# Altium PCB VECTOR_routed.PcbDoc (part 2 of 3)
Units mil, origin at the board's own origin, x right, y up, seen from the top; angles counter-clockwise.
Board outline 6000 x 4000 mil, 8 copper layers (Top Layer, Signal Layer 1, Signal Layer 2, Signal Layer 3, Signal Layer 4, VCC, Ground, Bottom Layer), stack 66.302 mil thick; 137 components, 274 nets, 1120 pads, 645 vias.
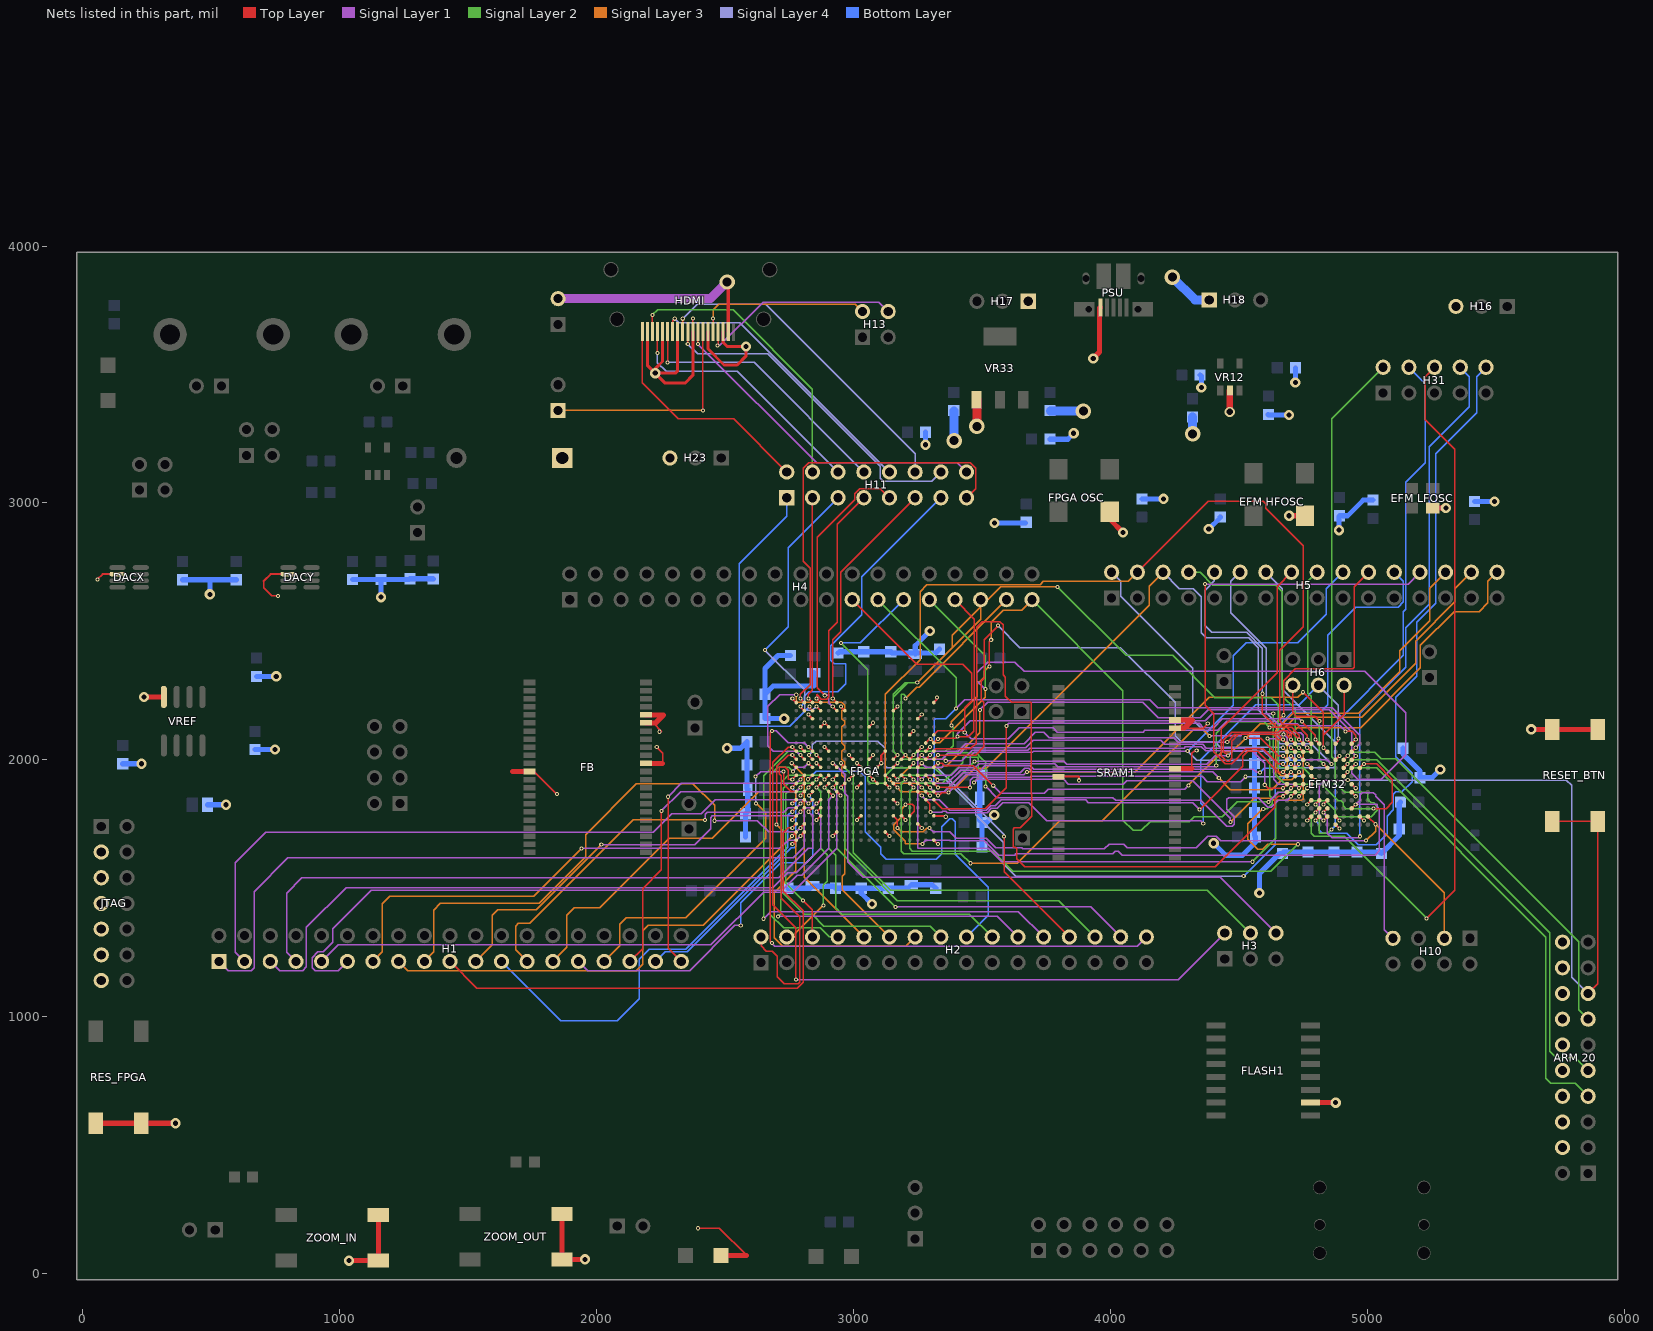
[diagram p8: the nets of this part, all layers, seen from the top]

## Via types
v1: diameter 16, hole 8, Top Layer to Bottom Layer, tented top, 295 vias
v2: diameter 16, hole 8, Top Layer to Bottom Layer, 264 vias
v3: diameter 40, hole 20, Top Layer to Bottom Layer, 75 vias
v4: diameter 60, hole 35, Top Layer to Bottom Layer, 10 vias
v5: diameter 40, hole 25, Top Layer to Bottom Layer, 1 vias

## Nets (pads, with @x,y where several pads share a name; then routed paths per layer and width w, separated by ;. In a path a pad name is that pad's centre, name@x,y a point inside that pad or via, vN(x,y) a via of type N, cw(c..) or ccw(c..) an arc to the next point about the centre after c; other vN are vias at no path point) (continued)
EBI.A11: EFM32.A9 FPGA.E18 H4.23 | length 2592.3
  Top Layer w5: H4.23@2995.08,2623.03 3246.11,2372 3425.38,2372 3460.62,2336.75 3460.62,2229.62 3433,2202 v2(3433,2106) 3426.52,2112.48 3328.46,2112.48 FPGA.E18@3312.72,2096.73 ; v2(4916,2110) 4941.57,2110 4955.24,2096.34 v1(4955.24,2078.23) EFM32.A9@4939.49,2062.48
  Signal Layer 1 w5: v2(3433,2106) 3457.47,2081.53 3602.69,2081.53 3645.21,2124.05 3777.5,2124.05 3793.55,2108 4127,2108 4134.69,2115.69 4418.32,2115.69 4452.42,2149.79 4642.94,2149.79 4652.47,2140.25 4727.94,2140.25 4736.1,2132.09 4893.91,2132.09 v2(4916,2110)
EBI.A12: EFM32.B9 FPGA.K12 H4.25 | length 3032.1
  Top Layer w5: FPGA.K12@3123.74,1939.25 v1(3139.49,1923.5) ; EFM32.B9@4939.49,2030.98 v1(4955.24,2046.73)
  Signal Layer 1 w5: v2(3399,2200) 3433.16,2234.16 4152.84,2234.16 4183.62,2203.38 4863.95,2203.38 4970.98,2096.34 4970.98,2062.48 v1(4955.24,2046.73)
  Signal Layer 2 w5: H4.25@3095.08,2623.03 3399,2319.11 v2(3399,2200)
  Signal Layer 3 w5: v1(3139.49,1923.5) 3155.43,1907.56 3344.61,1907.56 3344.8,1907.76
  Bottom Layer w5: v1@3139,1924 v1(3139.49,1923.5) 3154,1909 3308,1909 3312.56,1913.56 3312.56,1927.98 3314,1929.42 3314,2155 3319,2160 3359,2160 v2(3399,2200)
EBI.A13: EFM32.C9 FPGA.K13 H4.27 | length 3579.7
  Top Layer w5: FPGA.K13@3155.24,1939.25 v1(3170.98,1923.5) ; EFM32.C9@4939.49,1999.49 v1(4955.24,2015.24)
  Signal Layer 1 w5: v2(3492,2194) 3522,2224 4125,2224 4186.16,2162.84 4349.78,2162.84 4381.38,2194.44 4852.41,2194.44 4939.49,2107.36 4939.49,2096.34 4939.49,2030.98 v1(4955.24,2015.24)
  Signal Layer 2 w5: v2(2951,2455) 3055,2351 3055,1919 3065,1909 3117,1909 3123,1915 3123,1937 3155,1969 3315.05,1969 3344.8,1939.25 3186.73,1939.25 v1(3170.98,1923.5)
  Signal Layer 3 w5: v1@3170.24,1924.24 3214.44,1968.44 3340.81,1968.44 3349.19,1976.81 3362.81,1976.81 3492,2106 v2(3492,2194)
  Bottom Layer w5: v2(2951,2455) 3027.05,2455 H4.27@3195.08,2623.03
EBI.A14: EFM32.D9 FPGA.F17 H4.29 | length 3121.5
  Top Layer w5: FPGA.F17@3281.22,2065.24 3296.98,2081 v1(3299,2081) ; EFM32.D9@4939.49,1967.99 v1(4955.24,1983.74)
  Signal Layer 1 w5: v2(3513,2275) 3479.56,2308.44 3479.56,2338.29 3521.71,2380.44 3628.44,2380.44 3665.15,2343.72 4989.28,2343.72 5150,2183 5150,2020 5055,1925 4962.06,1925 4939.49,1947.57 4939.49,1967.99 v1(4955.24,1983.74)
  Signal Layer 2 w5: H4.29@3295.08,2623.03 3513,2405.11 v2(3513,2275)
  Signal Layer 3 w5: v1(3299,2081) 3314,2066 3335,2066 3513,2244 v2(3513,2275)
EBI.A15: EFM32.D10 FPGA.F18 H4.31 | length 3006.7
  Top Layer w5: FPGA.F18@3312.72,2065.24 v1(3328.46,2080.98) 3331.65,2084.17 3398.17,2084.17 v2(3404,2090) 3447,2090 3468,2111 3468,2204.18 3470.62,2206.81 3470.62,2547.49 H4.31@3395.08,2623.03 ; EFM32.D10@4970.98,1967.99 v1(4986.73,1983.74) 5036.34,1983.74 5098,1922.08 5098,1835 5073,1810 v1(5024,1810)
  Signal Layer 1 w5: v2(3404,2090) 3404,2101 3455,2152 4369,2152 4397,2180 v2(4634,2180)
  Signal Layer 2 w5: v2(4634,2180) 4634,1952 4681,1905 4822,1905 4886.3,1840.7 4898.22,1840.7 4906.68,1832.24 4906.68,1820.32 4917,1810 v1(5024,1810)
EBI.A16: EFM32.E4 FPGA.H13 H4.33 | length 3131.5
  Top Layer w5: FPGA.H13@3155.24,2002.24 v1(3171,2018) ; EFM32.E4@4782.01,1936.5 v1(4798,1920.5)
  Signal Layer 2 w5: v2(3248,2300) 3211,2300 ; v2(3794,2673) 4060.84,2406.16 4241.84,2406.16 4406,2242 4625.56,2242 4653.66,2213.9 4653.66,1967.99 4750.51,1967.99 v1(4798,1920.5) ; 3211,2300 3155,2244 3155,2034 v1(3171,2018) 3155.24,2033.74 3155.24,2254.8 3200.43,2300 3211,2300
  Signal Layer 3 w5: v2(3248,2300) 3385,2437 ; H4.33@3495.08,2623.03 H4.33@3495.08,2595.08 ; v2(3794,2673) 3573,2673 H4.33@3495.08,2595.08 ; 3385,2437 3385,2485 H4.33@3495.08,2595.08 ; 3385,2437 3495.08,2547.08 H4.33@3495.08,2595.08
EBI.A17: EFM32.F1 FPGA.H14 H4.35 | length 2505.3
  Top Layer w5: v1(3202.24,2017.76) FPGA.H14@3186.73,2002.24 v1@3202.48,2017.99 ; v2(4601,1902.53) 4614.28,1889.25 4653.66,1889.25 v1(4671.77,1889.25) EFM32.F1@4687.52,1905
  Signal Layer 1 w5: v2(3359,1996) 3420.37,1996 3461.99,2037.62 3679.1,2037.62 3686.47,2045 4286.56,2045 4292.31,2050.75 4354.55,2050.75 4370.33,2034.97 4552.03,2034.97 4601,1986 v2(4601,1902.53)
  Signal Layer 2 w5: v1@3202.48,2017.99 3186.73,2033.74 3186.73,2254.8 3195,2254.8 3203,2246.8 v1(3203,2239)
  Signal Layer 3 w5: v1(3202.24,2017.76) 3219,2001 3354,2001 v2(3359,1996) ; v1(3203,2239) 3247,2283 3255.05,2283 H4.35@3595.08,2623.03
EBI.A18: EFM32.F2 FPGA.H15 H4.37 | length 2703.6
  Top Layer w5: FPGA.H15@3218.23,2002.24 v1@3233.98,2017.99 ; v2(3529,2363) 3529,2458 3528,2459 v2(3536,2467) ; v1(4703.27,1889.25) EFM32.F2@4719.02,1905
  Signal Layer 1 w5: v2(4616.16,1836) 4653.66,1873.5 4687.52,1873.5 v1(4703.27,1889.25)
  Signal Layer 2 w5: v1(3234,2019) 3248.74,2033.74 3249.72,2033.74 3344.8,2033.74 3357.74,2033.74 3364,2040 3375,2040 3389,2054 3389,2125 v2(3381,2133) ; H4.37@3695.08,2623.03 4049,2269.11 4049,1765 4089,1725 4121,1725 4155,1759 4307,1759 4327,1779 4436,1779 4493,1836 v2(4616.16,1836)
  Signal Layer 3 w5: v2(3381,2133) 3381,2147 3482,2248 3482,2294.58 3508.44,2321.02 3508.44,2344.44 3527,2363 v2(3529,2363) ; v2(3536,2467) 3536,2535 3583,2582 3654.05,2582 H4.37@3695.08,2623.03
EBI.A19: EFM32.F3 FPGA.H16 | length 1671.1
  Top Layer w5: FPGA.H16@3249.72,2002.24 v1(3265.47,2017.99) ; v1(4734.76,1889.25) EFM32.F3@4750.51,1905
  Signal Layer 1 w5: v1(3265.47,2017.99) 3281.22,2002.24 3344.8,2002.24 3366.56,2024 3412.85,2024 3435.41,2046.56 3669.56,2046.56 3699,2076 4196,2076 4212,2060 4359.26,2060 4373.7,2045.56 4586.27,2045.56 4635,1996.83 4635,1923.66 4653.66,1905 4719.02,1905 v1(4734.76,1889.25)
EBI.A20: EFM32.F4 FPGA.G16 | length 2201.6
  Top Layer w5: FPGA.G16@3249.72,2033.74 v1(3265.47,2049.49) ; v1(4766.26,1889.25) EFM32.F4@4782.01,1905
  Signal Layer 1 w5: v1(3265.47,2049.49) 3249.72,2033.74 3249.72,1655.2 3525.08,1655.2 3577.28,1603 v2(4553,1603)
  Signal Layer 2 w5: v2(4553,1603) 4644,1694 4644,1863.84 4653.66,1873.5 4750.51,1873.5 v1(4766.26,1889.25)
EBI.A21: EFM32.G1 FPGA.G18 | length 3001.7
  Top Layer w5: FPGA.G18@3312.72,2033.74 3320.98,2042 3455,2042 3477,2064 3477,2200.44 3479.56,2203 3479.56,2515 3501.56,2537 3570,2537 3582,2525 3582,2329.97 3590.97,2321 3590.97,2248.03 3615,2224 3691,2224 3691,1868 3694,1865 3694,1780.88 3648.12,1735 3626,1735 3621,1730 3621,1659 3630,1659 3636,1653 3636,1615 3667,1584 4408,1584 4640,1816 4640,1844.09 4653.66,1857.76 v1(4671.77,1857.76) EFM32.G1@4687.52,1873.5
EBI.A22: EFM32.G2 FPGA.J13 | length 1944.4
  Top Layer w5: FPGA.J13@3155.24,1970.75 v1(3170.98,1986.5) ; v1(4703.27,1857.76) EFM32.G2@4719.02,1873.5
  Signal Layer 1 w5: v2(3514,1896) 3557.44,1852.56 4009.44,1852.56 4020,1842 4352,1842 4452,1742 4475,1742 4482,1749 4482,1779 4453,1808 4453,1846 4460,1853 4574.65,1853 4612.65,1815 4626.65,1815 4653.66,1842.01 4687.52,1842.01 v1(4703.27,1857.76)
  Signal Layer 2 w5: v1(3170.98,1986.5) 3186.73,2002.24 3344.8,2002.24 3369.56,2027 3477.64,2027 3498.06,2006.58 3498.06,2006.3 3514,1990.36 v2(3514,1896)
EBI.CS0: EFM32.D6 H6.6 | length 419.5
  Top Layer w5: H6.6@4710,2290 4710,2184.09 4724.09,2170 4795,2170 v2(4813.5,2151.5) ; v1(4829.25,1983.74) EFM32.D6@4845,1967.99
  Signal Layer 2 w5: v2(4813.5,2151.5) 4813.5,2096.34 4813.5,1999.49 v1(4829.25,1983.74)
EBI.CS1: EFM32.A5 FPGA.N18 | length 1866.7
  Top Layer w5: FPGA.N18@3312.72,1844.76 3312.72,1842.76 3345.6,1809.88 3455.12,1809.88 3513.93,1810.49 3595,1891.56 v2(3595,2132) ; v2(4745.39,2149.19) 4745.39,2148.71 4797.76,2096.34 v1(4797.76,2078.23) EFM32.A5@4813.5,2062.48
  Signal Layer 1 w5: v2(3595,2132) 3605,2142 4345,2142 4362.38,2124.62 4402,2124.62 4436.1,2158.73 4735.85,2158.73 v2(4745.39,2149.19)
EBI.D0: EFM32.B4 FPGA.K14 H5.2 | length 3009.3
  Top Layer w5: FPGA.K14@3186.73,1939.25 v1(3202.48,1923.5) ; v1(4766.26,2046.73) EFM32.B4@4782.01,2030.98
  Signal Layer 1 w5: v2(4386,2092) 4387.38,2093.38 4506.94,2093.38 4512,2098.44 4648.4,2098.44 4663.4,2113.44 4688.44,2113.44 4696.6,2105.28 4741.57,2105.28 4750.51,2096.34 4750.51,2062.48 v1(4766.26,2046.73)
  Signal Layer 2 w5: v1(3202.48,1923.5) 3186.73,1907.76 3186.73,1655.2 3186.73,1643.73 3195.47,1635 3418,1635 v2(3456,1597)
  Signal Layer 3 w5: v2(3456,1597) 3637,1597 3803,1763 3969,1763 4325,2119 4359,2119 v2(4386,2092)
  Signal Layer 4 w5: H5.2@4005,2730 4041,2694 4041,2636 4321.44,2355.56 4321.44,2156.56 v2(4386,2092)
EBI.D1: EFM32.A4 FPGA.L12 H5.4 | length 3456.1
  Top Layer w5: FPGA.L12@3123.74,1907.76 v1(3139.49,1892.01) ; H5.4@4105,2730 4381,3006 4595,3006 4605,2996 4605,2979 4750,2834 4750,2517 4659,2426 4659,2151.56 4675,2135.56 4727.04,2135.56 4766.26,2096.34 v1(4766.26,2078.23) EFM32.A4@4782.01,2062.48
  Signal Layer 3 w5: v1(3139.49,1892.01) 3123.74,1907.76 3123.74,2254.74 3259,2390 3259,2655 3286,2682 3727,2682 3739,2694 4069,2694 H5.4@4105,2730
EBI.D2: EFM32.C3 FPGA.L13 H5.6 | length 2836
  Top Layer w5: FPGA.L13@3155.24,1907.76 v1(3170.98,1892.01) ; v1(4734.76,2015.24) EFM32.C3@4750.51,1999.49
  Signal Layer 1 w5: v1(4734.76,2015.24) 4750.51,1999.49 4844.51,1999.49 v1(4860,1984)
  Signal Layer 3 w5: v1(3170.98,1892.01) 3186.73,1876.26 3352.84,1876.26 3363.02,1886.44 3391.44,1886.44 3471.5,1966.5 3517.2,1966.5 4151.4,2600.7 4151.4,2676.4 H5.6@4205,2730
  Signal Layer 4 w5: H5.6@4205,2730 4269,2666 4323,2666 4354,2635 4354,2495 4374,2475 4538,2475 4576,2437 4576,2193.94 4650,2119.94 4650,2075 4662,2063 4781,2063 v1(4860,1984)
EBI.D3: EFM32.B3 FPGA.K15 H5.8 | length 3118.2
  Top Layer w5: FPGA.K15@3218.23,1939.25 v1(3233.98,1923.5) ; v1@4734,2047 4734.5,2047 v1(4734.76,2046.73) EFM32.B3@4750.51,2030.98
  Signal Layer 1 w5: v2(3469,1911) 3481.44,1923.44 3818.56,1923.44 3836.44,1905.56 4049.62,1905.56 4063.06,1919 4321.19,1919 4467,1773.19 v2(4467,1757)
  Signal Layer 2 w5: v1(3233.98,1923.5) 3249.92,1907.56 3344.61,1907.56 3425,1987.96 3425,2005 3430,2010 3482,2010 3486,2006 3486,1928 v2(3469,1911) ; H5.8@4305,2730 4349,2730 4399,2680 4644,2680 4669,2655 4669,2248 4719,2198 4719,2061 4733.27,2046.73 v1(4734.76,2046.73)
  Signal Layer 3 w5: v2(4467,1757) 4560.44,1850.44 4628,1850.44 4636.44,1842 4745,1842 4750,1847 4750,2031 v1@4734,2047
EBI.D4: EFM32.A3 FPGA.K16 H5.10 | length 2610.2
  Top Layer w5: FPGA.K16@3249.72,1939.25 v1(3265.47,1923.5) ; v2(4592,2257) 4592,2181 4647,2126 ; v2(4619,2126) 4647,2126 ; EFM32.A3@4750.51,2062.48 v1(4734.76,2078.23) ; 4647,2126 4686.99,2126 ; 4686.99,2126 v1(4734.76,2078.23) ; 4686.99,2126 4705.1,2126 4734.76,2096.34 v1(4734.76,2078.23)
  Signal Layer 1 w5: v1(3265.47,1923.5) 3281.22,1939.25 3344.8,1939.25 3381,1939.25 3410.31,1968.56 3472.25,1968.56 3489,1985.31 3782.69,1985.31 3795,1973 4407,1973 v2(4412,1978)
  Signal Layer 2 w5: v2(4412,1978) 4412,2104 4455,2147 4598,2147 v2(4619,2126)
  Signal Layer 4 w5: H5.10@4405,2730 4405,2696 4369,2660 4369,2522 4395,2496 4530,2496 4592,2434 v2(4592,2257)
EBI.D5: EFM32.B2 FPGA.L15 H5.12 | length 3412.8
  Top Layer w5: FPGA.L15@3218.23,1907.76 v1(3233.98,1892.01) ; v1(4703.27,2046.73) EFM32.B2@4719.02,2030.98
  Signal Layer 1 w5: v2(4611,2082) 4646.67,2082 4657.34,2092.66 4667.66,2092.66 v1(4674,2099) 4687.52,2085.48 4687.52,2062.48 v1(4703.27,2046.73)
  Signal Layer 2 w5: v1(3233.98,1892.01) 3218.23,1876.26 3218.23,1655.2 3229.49,1643.94 3541.42,1643.94 3619.3,1566.06 4625.06,1566.06 v2(4730,1671) ; v2(4595,1809) 4610,1809 4630.6,1829.59 4630.6,1850.44 4621,1860.03 4621,2072 v2(4611,2082)
  Signal Layer 3 w5: v2(4595,1809) 4594,1809 4535,1750 4535,1691 4574.44,1651.56 4593.98,1651.56 4613.42,1671 v2(4730,1671)
  Signal Layer 4 w5: H5.12@4505,2730 4469,2694 4469,2573 4607,2435 4607,2182.65 4674,2115.65 v1(4674,2099)
EBI.D6: EFM32.A2 FPGA.L16 H5.14 | length 3076.4
  Top Layer w5: FPGA.L16@3249.72,1907.76 v1(3265.47,1892.01) ; v2(4458,2016) 4440,2034 4440,2075 4473,2108 4653.69,2108 4659.13,2113.44 4680,2113.44 ; EFM32.A2@4719.02,2062.48 v1(4703.27,2078.23) ; 4680,2113.44 4688.44,2105 4688.44,2093.06 v1(4703.27,2078.23) ; 4680,2113.44 4686.17,2113.44 4703.27,2096.34 v1(4703.27,2078.23)
  Signal Layer 1 w5: v2(3471,1993) 3472.25,1994.25 3818.75,1994.25 3830.19,1982.81 4375.81,1982.81 4409,2016 v2(4458,2016)
  Signal Layer 2 w5: v1(3265.47,1892.01) 3281.22,1876.26 3344.8,1876.26 3352.84,1876.26 3469.58,1993 v2(3471,1993)
  Signal Layer 4 w5: v2(4458,2016) 4475,2033 4600,2033 4602,2031 4712,2031 4718,2025 4718,1975 4724,1969 4870,1969 4875,1974 4875,2068.84 4669,2274.84 4669,2666 H5.14@4605,2730
EBI.D7: EFM32.A1 FPGA.H17 H5.16 | length 2662
  Top Layer w5: FPGA.H17@3281.22,2002.24 v1(3296.97,2017.99) ; v2(4455,2068.62) 4484.81,2098.44 4498.44,2098.44 ; EFM32.A1@4687.52,2062.48 v1(4671.77,2078.23) ; H5.16@4705,2730 4649,2674 4649,2338.57 4431,2120.57 4431,2015 4452,1994 4462,1994 4473,2005 4473,2073 4498.44,2098.44 ; 4498.44,2098.44 4499,2099 4632.89,2099 4633.45,2098.44 ; 4498.44,2098.44 4633.45,2098.44 ; 4633.45,2098.44 4651.56,2098.44 v1(4671.77,2078.23) ; 4633.45,2098.44 4653.66,2078.23 v1(4671.77,2078.23)
  Signal Layer 1 w5: v1(3296.97,2017.99) 3312.72,2033.74 3344.8,2033.74 3408,2033.74 3436.26,2062 3664,2062 3708.17,2106.17 3740.83,2106.17 3761,2086 4247,2086 4264.06,2068.94 4362.62,2068.94 4362.94,2068.62 v2(4455,2068.62)
EBI.D8: EFM32.B1 FPGA.H18 H5.18 | length 2973.9
  Top Layer w5: FPGA.H18@3312.72,2002.24 v1(3328.46,2017.99) 3344.8,2017.99 3475,2017.99 3507,2049.99 3507,2223 3498,2232 3498,2306 3509,2317 3509,2468 v2(3563,2522) ; v1@4671,2048 4671,2047.5 v1(4671.77,2046.73) ; v1@4672.27,2046.73 v1(4671.77,2046.73) ; v1(4671.77,2046.73) EFM32.B1@4687.52,2030.98 v1(4671.77,2046.73)
  Signal Layer 2 w5: v1@4672.27,2046.73 4688,2031 4775,2031 4781,2037 4781,2247 4769,2259 4769,2694 H5.18@4805,2730
  Signal Layer 4 w5: v2(3563,2522) 3648,2437 4038,2437 4252,2223 4252,2094 4275,2071 4404,2071 4427,2048 v1@4671,2048
EBI.D9: EFM32.C2 FPGA.J16 H5.20 | length 2669.6
  Top Layer w5: FPGA.J16@3249.72,1970.75 v1(3265.47,1986.5) ; v1@4703,2014 4714,2003 4719.02,2003 EFM32.C2@4719.02,1999.49 v1@4703.27,2015.24
  Signal Layer 1 w5: v1(3265.47,1986.5) 3281.22,1970.75 3344.8,1970.75 3351.96,1977.91 3450,1977.91 3455,1982.91 3455,2014 3469.69,2028.69 3695.31,2028.69 3700.63,2034 v2(4301,2034)
  Signal Layer 4 w5: v2(4301,2034) 4336,1999 4687,1999 ; v1@4703,2014 4703,2005 4697,1999 4687,1999 ; v1(4703,2015) 4687,1999
  Bottom Layer w5: v2(4301,2034) 4479,2212 4479,2405 4529,2455 4730,2455 4841,2566 4841,2666 H5.20@4905,2730
EBI.D10: EFM32.C1 FPGA.J18 H5.22 | length 2562.7
  Top Layer w5: FPGA.J18@3312.72,1970.75 v1(3328.46,1986.5) 3344.8,1986.5 3355.3,1976 3467,1976 v2(3544,1899) ; v2(4526,2084) 4584.9,2084 4653.66,2015.24 v1(4671.77,2015.24) EFM32.C1@4687.52,1999.49 ; v2(4674,2173.25) 4674,2308 4720,2354 4943,2354 4949,2360 4949,2674 H5.22@5005,2730
  Signal Layer 1 w5: v2(3544,1899) 3573,1870 3743,1870 3759,1886 4290,1886 v2(4304,1900)
  Signal Layer 3 w5: v2(4304,1900) 4435,2031 4473,2031 v2(4526,2084) 4582.85,2140.85 4641.6,2140.85 v2(4674,2173.25)
EBI.D11: EFM32.D2 FPGA.K17 H5.24 | length 2739.5
  Top Layer w5: FPGA.K17@3281.22,1939.25 v1(3296.97,1923.5) ; v1(4703.27,1983.74) EFM32.D2@4719.02,1967.99 4719.02,1976 4726,1976 v1(4734,1984)
  Signal Layer 1 w5: v1(3296.97,1923.5) 3312.91,1907.56 3332.98,1907.56 3333.17,1907.76 3365.13,1907.76 3417,1959.62 3494.38,1959.62 3511.13,1976.38 3688.85,1976.38 3701.66,1963.56 4557.06,1963.56 4569.62,1951 v2(4583,1951)
  Bottom Layer w5: v2(4583,1951) 4599,1967 4665,1967 ; v1@4703,1984 4686,1967 ; v1(4734,1984) 4734,1975 4726,1967 4686,1967 ; H5.24@5105,2730 5140.97,2694.03 5140.97,2615 5120,2594.03 4955,2594.03 4846,2485.03 4846,2215 4816,2185 4708.44,2185 4655,2131.56 4655,1977 4665,1967 ; 4665,1967 4686,1967
EBI.D12: EFM32.D1 FPGA.K18 H5.26 | length 3996.2
  Top Layer w5: FPGA.K18@3312.72,1939.25 3312.72,1936.28 v1(3327,1922) ; v2(4369,2684) 4369,2212 4402.38,2178.62 4402.38,2030.62 4448,1985 4472,1985 4529,2042 4595.4,2042 4653.66,1983.74 v1(4671.77,1983.74) EFM32.D1@4687.52,1967.99 v1@4672.26,1983.26
  Signal Layer 1 w5: v2(4369,2684) 5159,2684 H5.26@5205,2730
  Signal Layer 4 w5: v1(3327,1922) 3359.42,1922 3476.44,1804.98 3476.44,1784.98 3583,1678.42 3583,1595 3631,1547 v2(4519,1547)
  Bottom Layer w5: v2(4519,1547) 4642,1670 4642,1895 4682,1935 4740,1935 4750,1945 4750,1994 4745,1999 4688,1999 v1@4672.26,1983.26
EBI.D13: EFM32.E3 FPGA.L17 H5.28 | length 2857.3
  Top Layer w5: FPGA.L17@3281.22,1907.76 v1(3296.97,1892.01) ; v1(4734.76,1952.24) EFM32.E3@4750.51,1936.5 v1@4735.01,1952
  Signal Layer 1 w5: v1(3296.97,1892.01) 3312.72,1876.26 3352.84,1876.26 3426.84,1950.25 3649.81,1950.25 3667,1967.44 3682,1967.44 3696.44,1953 4398,1953 v2(4421.97,1929.03)
  Signal Layer 3 w5: v2(4421.97,1929.03) 4467.44,1883.56 4628.44,1883.56 4667.88,1923 ; v1@4735,1952 4706,1923 4667.88,1923 ; H5.28@5305,2730 5243,2668 5243,2541 5127,2425 5127,2342 4965.97,2180.97 4710.61,2180.97 4643.35,2113.71 4643.35,1939.65 4660,1923 4667.88,1923
EBI.D14: EFM32.E2 FPGA.L18 H5.30 | length 2805.4
  Top Layer w5: FPGA.L18@3312.72,1907.76 v1(3328.46,1892.01) 3344.8,1892.01 v2(3454,1892.01) ; v1@4703,1952 4703.51,1952 EFM32.E2@4719.02,1936.5 v1(4703.27,1952.24)
  Signal Layer 1 w5: v2(3454,1892.01) 3454,1920 3466.38,1932.38 3688.38,1932.38 3691,1935 4357,1935 4377.41,1914.59 4506.59,1914.59 v2(4526,1934)
  Signal Layer 3 w5: v1@4703,1952 4688,1937 4665,1937 4653.22,1948.78 4653.22,2100.12 4719.55,2166.44 4979.44,2166.44 5188,2375 5188,2462 5341,2615 5341,2666 H5.30@5405,2730
  Signal Layer 4 w5: v2(4526,1934) 4685,1934 v1@4703,1952
EBI.D15: EFM32.E1 FPGA.M16 H5.32 | length 3002.9
  Top Layer w5: FPGA.M16@3249.72,1876.26 v1(3265.47,1860.51) ; v2(4347,1806) 4514.79,1973.79 4514.79,2012.79 4535,2033 4572.91,2033 4653.66,1952.24 v1(4671.77,1952.24) EFM32.E1@4687.52,1936.5 v1@4672.02,1952
  Signal Layer 1 w5: v1(3265.47,1860.51) 3281.22,1844.76 3333.24,1844.76 3375,1803 3515.97,1803 3533.35,1820.37 3551.13,1820.37 3574.38,1843.62 3903.38,1843.62 3914.56,1832.44 4320.56,1832.44 v2(4347,1806)
  Signal Layer 3 w5: v1@4672,1952 4688,1968 4688,2084.73 4728.27,2125 4974.16,2125 5206.46,2357.29 5206.46,2445 5338.58,2577.13 5435,2577.13 5469,2611.13 5469,2694 H5.32@5505,2730
EBI.REN: EFM32.A7 FPGA.N17 H6.4 | length 2269.2
  Top Layer w5: FPGA.N17@3281.22,1844.76 3296.97,1829.02 3296.97,1798.03 v1(3299,1796) ; EFM32.A7@4876.5,2062.48 4888,2073.98 v1(4888,2083)
  Signal Layer 1 w5: v1@3298,1797 v1(3299,1796) 3300,1795 3342.58,1795 3347.02,1799.44 3358.98,1799.44 3364.35,1794.06 3519.68,1794.06 3537.05,1811.44 3558.95,1811.44 3559.51,1810.88 3581.63,1833 3682,1833 3753,1762 4351.44,1762 v2(4361.44,1752)
  Signal Layer 4 w5: H6.4@4810,2290 4888,2212 v1(4888,2083)
  Bottom Layer w5: v2(4361.44,1752) 4361.44,1820.44 4352,1829.88 4352,2000 4566.44,2214.44 4734.44,2214.44 H6.4@4810,2290
EBI.WEN: EFM32.B6 FPGA.M18 H6.2 | length 2155.6
  Top Layer w5: FPGA.M18@3312.72,1876.26 v1(3328.46,1860.51) ; v1@3331.49,1860.51 3342.98,1872 v2(3369,1872) ; v2(4750,2263) 4829,2184 4829,2046.98 v1(4829.25,2046.73) ; EFM32.B6@4845,2030.98 v1(4829.25,2046.73) ; H6.2@4910,2290 4910,2177.09 4829.25,2096.34 v1(4829.25,2046.73)
  Signal Layer 1 w5: v2(3369,1872) 3438.31,1941.31 3663.31,1941.31 v2(3675,1953)
  Signal Layer 3 w5: v2(3675,1953) 4096,1953 4385.56,2242.56 4729.56,2242.56 v2(4750,2263)
EFM_CLK: EFM32.J9 FPGA.R15 H10.7 | length 3160.5
  Top Layer w5: v1(3203,1825) 3204.79,1826.79 3228.28,1826.79 3236.2,1818.87 3236.2,1799.74 FPGA.R15@3218.23,1781.77 ; EFM32.J9@4939.49,1810.51 v1(4955,1826)
  Signal Layer 1 w5: v1@3267,1671 v1(3268.32,1672.32) 3282,1686 3375.36,1686 3376.3,1685.06 3508.94,1685.06 3565.44,1628.56 3626.98,1628.56 3632.42,1634 4009.29,1634 4019.02,1643.73 4030.98,1643.73 4045.77,1628.94 5031.3,1628.94 5047.44,1645.08 5047.44,1806.98 5038.06,1816.35 5038.06,1826 v1(4955,1826) 4972.3,1843.3 4972.3,1863.74 4980.75,1872.19 5024.21,1872.19 5032.66,1863.74 5032.66,1858.32 5065.94,1825.05 5065.94,1339.06 H10.7@5100,1305
  Signal Layer 2 w5: v1@3266,1674.64 v1(3268.32,1672.32)
  Signal Layer 3 w5: v1(3203,1825) 3188.04,1810.04 3188.04,1778.04 3156.56,1746.56 3156.56,1728.02 3201.68,1682.91 3201.68,1672.32 v1(3268.32,1672.32)
EFM_RX: EFM32.K11 FPGA.R13 H10.3 | length 2639.3
  Top Layer w5: FPGA.R13@3155.24,1781.77 3171,1766.01 v1(3171,1734) ; EFM32.K11@5002.48,1779.02 v1(5032.5,1749)
  Signal Layer 1 w5: v1(3295,1734) 3310,1719 3375,1719 3400,1694 3517.14,1694 3553.7,1657.44 3654.56,1657.44 3659.06,1652.94 3977,1652.94 3995.67,1671.61 4052.08,1671.61 4066.37,1657.31 4335,1657.31 4379.12,1701.44 4412.95,1701.44 4429.39,1685 4723.58,1685 4724.02,1685.44 4736.56,1685.44 4737,1685 v2(4995,1685)
  Signal Layer 3 w5: v1(3171,1734) 3173,1734 3186.91,1720.09 3271.45,1720.09 3285.36,1734 v1(3295,1734) ; v2(4995,1685) 5032.5,1722.5 v1(5032.5,1749) 5300,1481.5 H10.3@5300,1305
FB.A0: FPGA.N4 H1.1 | length 2892.1
  Top Layer w5: v1(2856.02,1829.02) FPGA.N4@2871.77,1844.76
  Signal Layer 1 w5: H1.1@529.33,1215.16 565.49,1179 655,1179 666,1190 666,1487 797,1618 2765,1618 2809,1662 2809,1807 2815,1813 2839.77,1813 2855.79,1829.02 v1(2856.02,1829.02)
FB.A1: FPGA.N3 H1.3 | length 2761
  Top Layer w5: v1(2824.53,1829.02) FPGA.N3@2840.28,1844.76
  Signal Layer 1 w5: H1.3@629.33,1215.16 593,1251.49 593,1599 712,1718 2221,1718 2293,1790 2407.12,1790 2461.89,1844.76 2745.2,1844.76 2808.78,1844.76 v1(2824.53,1829.02)
FB.A2: FPGA.P4 H1.5 | length 2615.4
  Top Layer w5: v1(2856.02,1797.52) FPGA.P4@2871.77,1813.27
  Signal Layer 1 w5: H1.5@729.33,1215.16 765.49,1179 855,1179 870,1194 870,1347 1024.5,1501.5 2684.88,1501.5 2743.38,1560 2776.57,1560 2871.77,1655.2 2871.77,1781.77 v1(2856.02,1797.52)
FB.A3: FPGA.P3 H1.7 | length 2571.4
  Top Layer w5: v1(2824.53,1797.52) FPGA.P3@2840.28,1813.27
  Signal Layer 1 w5: H1.7@829.33,1215.16 793,1251.49 793,1481 852.3,1540.3 2709.77,1540.3 2824.67,1655.2 2840.28,1655.2 2840.28,1781.77 v1(2824.53,1797.52)
FB.A4: FPGA.L6 H1.9 | length 2453.3
  Top Layer w5: v1(2919.02,1892.01) FPGA.L6@2934.76,1907.76
  Signal Layer 1 w5: H1.9@929.33,1215.16 993.17,1279 2445.06,1279 2649.69,1483.62 2763.19,1483.62 2934.76,1655.2 2934.76,1876.26 v1(2919.02,1892.01)
FB.A5: FPGA.M5 H1.11 | length 2647.2
  Top Layer w5: FPGA.M5@2903.27,1876.26 v1(2919.53,1860)
  Signal Layer 1 w5: H1.11@1029.33,1215.16 993.17,1179 905,1179 893,1191 893,1230 915,1252 935,1252 973,1290 973,1343 1122.56,1492.56 2721.56,1492.56 2780,1551 2799.07,1551 2903.27,1655.2 2903.27,1843.74 v1(2919.53,1860)
FB.A6: FPGA.U2 H1.13 | length 1998.3
  Top Layer w5: v1(2793.03,1703.03) FPGA.U2@2808.78,1718.78
  Signal Layer 1 w5: v2(1941,1655) 2712.91,1655 2745.2,1687.28 2777.28,1687.28 v1(2793.03,1703.03)
  Signal Layer 3 w5: H1.13@1129.33,1215.16 1166,1251.83 1166,1440 1195,1469 1755,1469 v2(1941,1655)
FB.A7: FPGA.U1 H1.15 | length 1863.3
  Top Layer w5: v1@2761.54,1703.03 FPGA.U1@2777.28,1718.78
  Signal Layer 3 w5: H1.15@1229.33,1215.16 1265.49,1179 2155,1179 2179,1203 2179,1335 2200,1356 2414,1356 v1(2761,1703)
FB.A8: FPGA.T2 H1.17 | length 2038.7
  Top Layer w5: v1(2793.03,1734.53) FPGA.T2@2808.78,1750.28
  Signal Layer 1 w5: v2(2459.44,1762.56) 2625.98,1762.56 2669.77,1718.78 2745.2,1718.78 2777.28,1718.78 v1(2793.03,1734.53)
  Signal Layer 3 w5: H1.17@1329.33,1215.16 1366,1251.83 1366,1415 1392,1441 1776,1441 1957,1622 1957,1709 2155,1907 2375,1907 2459.44,1822.56 v2(2459.44,1762.56)
FB.A9: FPGA.T1 H1.19 | length 2105.9
  Top Layer w5: H1.19@1429.33,1215.16 1533.49,1111 2781,1111 2804,1134 2804,1412 2727,1489 2727,1716.33 2745.2,1734.53 v1(2761.54,1734.53) FPGA.T1@2777.28,1750.28
FB.A10: FPGA.P2 H1.21 | length 1620.7
  Top Layer w5: v1(2793.03,1797.52) FPGA.P2@2808.78,1813.27
  Signal Layer 1 w5: v2(2018,1670) 2382,1670 2443.56,1731.56 2443.56,1775 2450.33,1781.77 2745.2,1781.77 2777.28,1781.77 v1(2793.03,1797.52)
  Signal Layer 3 w5: H1.21@1529.33,1215.16 1593,1278.83 1593,1395 1614,1416 1764,1416 v2(2018,1670)
FB.A11: FPGA.P1 H1.23 | length 1750.3
  Top Layer w5: v1(2761.54,1797.52) FPGA.P1@2777.28,1813.27
  Bottom Layer w5: H1.23@1629.33,1215.16 1860.49,984 2081,984 2166,1069 2166,1223 2205.34,1262.34 2347.7,1262.34 2744,1658.64 2744,1783 2758.52,1797.52 v1(2761.54,1797.52)
FB.A12: FPGA.N2 H1.25 | length 1496.5
  Top Layer w5: v1(2793.03,1829.02) FPGA.N2@2808.78,1844.76
  Signal Layer 1 w5: v2(2422,1766) 2422,1787 2430.94,1795.94 2727.87,1795.94 2745.2,1813.27 2777.28,1813.27 v1(2793.03,1829.02)
  Signal Layer 3 w5: H1.25@1729.33,1215.16 1684.43,1260.06 1684.43,1352.58 1695,1363.15 1739.15,1363.15 2142,1766 v2(2422,1766)
FB.A13: FPGA.N1 H1.27 | length 1365.2
  Top Layer w5: v1(2761.54,1829.02) FPGA.N1@2777.28,1844.76
  Signal Layer 3 w5: H1.27@1829.33,1215.16 1884.46,1270.29 1884.46,1395 1912.39,1422.92 2011.92,1422.92 2283,1694 2449,1694 2631,1876 2770,1876 2776,1870 2776,1843.48 v1(2761.54,1829.02)
FB.A14: FPGA.M3 H1.29 | length 1424.4
  Top Layer w5: v1(2827,1861) 2840.28,1874.28 FPGA.M3@2840.28,1876.26
  Signal Layer 1 w5: H1.29@1929.33,1215.16 1965.49,1179 2362,1179 2538,1355 v2(2561,1355)
  Bottom Layer w5: v2(2561,1355) 2561,1442.62 2716.91,1598.53 2815,1598.53 2841,1624.53 2841,1843 v1@2825,1859
FB.A15: FPGA.M1 H1.31 | length 1353.8
  Top Layer w5: v2(2728,1954) 2728,1905.13 2755.56,1877.57 FPGA.M1@2771.74,1877.57
  Signal Layer 1 w5: v2(2619,1935) 2638,1954 v2(2728,1954)
  Signal Layer 3 w5: H1.31@2029.33,1215.16 2090,1275.83 2090,1359 2115,1384 2347,1384 2658,1695 2658,1794 2622,1830 v2(2621,1830)
  Signal Layer 4 w5: v2(2619,1935) 2619,1832 v2(2621,1830)
FB.A16: FPGA.L2 H1.33 | length 1237.7
  Top Layer w5: H1.33@2129.33,1215.16 2179,1264.83 2179,1498 2252,1571 v2(2252,1801.12) ; v1(2793.03,1892.01) FPGA.L2@2808.78,1907.76
  Signal Layer 1 w5: v2(2252,1801.12) 2327.14,1876.26 2745.2,1876.26 2777.28,1876.26 v1(2793.03,1892.01)
FB.A17: FPGA.L1 H1.35 | length 990.9
  Top Layer w5: v1@2758,1890 v1@2759,1891 ; v1(2761.54,1892.01) FPGA.L1@2777.28,1907.76
  Bottom Layer w5: H1.35@2229.33,1215.16 2267.17,1253 2353.51,1253 2757.51,1657 2770,1657 2776,1663 2776,1874 v1@2759,1891
FB.A18: FPGA.K2 H1.37 | length 1227.4
  Top Layer w5: v2(2278,1856) 2278,1266.49 H1.37@2329.33,1215.16 ; v1(2793.03,1923.5) FPGA.K2@2808.78,1939.25
  Signal Layer 1 w5: v2(2278,1856) 2329.76,1907.76 2745.2,1907.76 2777.28,1907.76 v1(2793.03,1923.5)
FB.CS: FPGA.J6 H3.6 | length 2215
  Top Layer w5: v1(2919.02,1986.5) FPGA.J6@2934.76,1970.75
  Signal Layer 1 w5: v1(2919.02,1986.5) 2922.5,1986.5 2966,1943 2966,1870 2978,1858 2978,1602 3037,1543 4427,1543 H3.6@4645,1325
FB.D0: FPGA.K1 H2.2 | length 1278.7
  Top Layer w5: H2.2@2640,1310 2640,1275 2660,1255 2683,1255 2703,1235 2703,1155 2730,1128 2785,1128 2791,1134 2791,1388 2718,1461 2718,1938 2710.56,1945.44 2710.56,1969 2711.56,1970 2735,1970 2745.2,1959.8 2745.2,1923.5 v1(2761.54,1923.5) FPGA.K1@2777.28,1939.25
FB.D1: FPGA.L4 H2.4 | length 706.6
  Top Layer w5: v1(2856.02,1892.01) FPGA.L4@2871.77,1907.76
  Signal Layer 2 w5: v1(2856.02,1892.01) 2871.77,1876.26 2871.77,1655.2 2897.44,1629.53 2897.44,1526.56 2883,1512.12 v2(2883,1433)
  Signal Layer 3 w5: H2.4@2740,1310 2774,1310 2774,1324 v2(2883,1433)
FB.D2: FPGA.L3 H2.6 | length 721.1
  Top Layer w5: v2(2804,1452) 2840,1416 H2.6@2840,1310 ; v1(2824.53,1892.01) FPGA.L3@2840.28,1907.76
  Signal Layer 2 w5: v2(2804,1452) 2736.26,1519.74 2736.26,1867.32 2745.2,1876.26 2808.78,1876.26 v1(2824.53,1892.01)
FB.D3: FPGA.J3 H2.8 | length 1050.1
  Top Layer w5: v1(2824.53,1986.5) FPGA.J3@2840.28,1970.75
  Signal Layer 1 w5: v1@2760.95,1955 v1(2764,1955) 2779.75,1970.75 2782,1970.75 2808.78,1970.75 v1(2824.53,1986.5)
  Signal Layer 2 w5: v1(2764,1955) 2748,1971 2704,1971 2676.62,1943.62 2676.62,1397.38 2728,1346 2870,1346 2906,1310 H2.8@2940,1310
FB.D4: FPGA.J1 H2.10 | length 815
  Top Layer w5: v1@2761.54,1986.5 FPGA.J1@2777.28,1970.75
  Signal Layer 3 w5: v1(2759.5,1986.5) 2808,1938 2808,1542 H2.10@3040,1310
FB.D5: FPGA.H2 H2.12 | length 1688
  Top Layer w5: v1(2793.03,2017.99) FPGA.H2@2808.78,2002.24
  Signal Layer 1 w5: v1(2777,2253) 2712,2253 2667,2208 2667,2055 2688.26,2033.74 2777.28,2033.74 v1(2793.03,2017.99)
  Signal Layer 3 w5: v1(2777,2253) 2777,2230 2783,2224 2955,2224 2955,2221.41 2956.49,2221.41 2964.95,2212.95 2964.95,2200.99 2956.49,2192.53 2955,2192.53 2955,2158.41 2956.49,2158.41 2964.95,2149.96 2964.95,2138 2956.49,2129.54 2955,2129.54 2955,2063.93 2956.49,2063.93 2964.95,2055.47 2964.95,2043.51 2956.49,2035.05 2955,2035.05 2955,2000.93 2956.49,2000.93 2964.95,1992.48 2964.95,1980.52 2956.49,1972.06 2955,1972.06 2955,1937.94 2956.49,1937.94 2964.95,1929.48 2964.95,1555.34 2955.56,1545.95 2955.56,1524.05 2956.49,1523.12 2956.49,1493.51 H2.12@3140,1310
FB.D6: FPGA.H1 H2.14 | length 1436
  Top Layer w5: v2(2700,1748) 2701.62,1749.62 2701.62,1974.42 2745.2,2017.99 v1(2761.54,2017.99) FPGA.H1@2777.28,2002.24
  Signal Layer 3 w5: v2(2700,1748) 2729,1719 2770,1719 2776,1713 2776,1567 2691,1482 2691,1308 2725,1274 3204,1274 H2.14@3240,1310
FB.D7: FPGA.K4 H2.16 | length 1258.1
  Top Layer w5: v1(2856.02,1923.5) FPGA.K4@2871.77,1939.25
  Signal Layer 2 w5: v1(2856.02,1923.5) 2840.28,1907.76 2745.2,1907.76 2727.32,1889.88 2727.32,1479.68 2808.54,1398.46 2838.45,1398.46 2884.9,1352 3298,1352 H2.16@3340,1310
FB.D8: FPGA.K3 H2.18 | length 1558.3
  Top Layer w5: v1@2824.53,1923.5 FPGA.K3@2840.28,1939.25
  Bottom Layer w5: v1(2823,1924) 2854,1955 3025,1955 3045,1935 3045,1719 3105.44,1658.56 3105.44,1635 3127.44,1613 3322,1613 3344,1635 3344,1739 3375,1770 3385,1770 3396,1759 3396,1632 3525,1503 3525,1395 H2.18@3440,1310
FB.D9: FPGA.L5 H2.20 | length 1165.1
  Top Layer w5: v1(2887.52,1892.01) FPGA.L5@2903.27,1907.76
  Signal Layer 2 w5: v1(2887.52,1892.01) 2903.27,1876.26 2903.27,1655.2 2931,1627.47 2931,1423 2955,1399 3451,1399 H2.20@3540,1310
FB.D10: FPGA.K5 H2.22 | length 1703.7
  Top Layer w5: v1(2887.52,1923.5) FPGA.K5@2903.27,1939.25
  Signal Layer 1 w5: v2(2706,1390) 3560,1390 H2.22@3640,1310
  Signal Layer 2 w5: v2(2706,1390) 2716,1400 2716,1910.05 2745.2,1939.25 2871.77,1939.25 v1(2887.52,1923.5)
FB.D11: FPGA.H4 H2.24 | length 1973.6
  Top Layer w5: v1(2856.02,2017.99) FPGA.H4@2871.77,2002.24
  Signal Layer 1 w5: v2(2650,1381) 2677,1408 3642,1408 H2.24@3740,1310
  Signal Layer 2 w5: v2(2650,1381) 2650,1938.54 2745.2,2033.74 2840.28,2033.74 v1(2856.02,2017.99)
FB.D12: FPGA.H3 H2.26 | length 1515.1
  Top Layer w5: v1@2824.53,2017.99 FPGA.H3@2840.28,2002.24 ; v2(3586,1701) 3586,1564 H2.26@3840,1310
  Signal Layer 4 w5: v1(2826,2018) 2840,2032 2840,2058 2855,2073 3095,2073 3124,2044 3124,1975 3130.56,1968.44 3325.62,1968.44 3586,1708.06 v2(3586,1701)
FB.D13: FPGA.L7 H2.28 | length 1382.3
  Top Layer w5: v1(2950.51,1892.01) FPGA.L7@2966.26,1907.76
  Signal Layer 2 w5: v1(2950.51,1892.01) 2966.26,1876.26 2966.26,1655.2 3170.46,1451 3799,1451 H2.28@3940,1310
FB.D14: FPGA.K6 H2.30 | length 1545.3
  Top Layer w5: v1(2919.02,1923.5) FPGA.K6@2934.76,1939.25
  Signal Layer 1 w5: v2(3162.96,1427) 3923,1427 H2.30@4040,1310
  Signal Layer 2 w5: v1(2919.02,1923.5) 2934.76,1907.76 2934.76,1655.2 v2(3162.96,1427)
FB.D15: FPGA.G3 H2.32 | length 2499
  Top Layer w5: v2(2682,1286) 2676.62,1291.38 2676.62,2106.62 v2(2682,2112) ; v1(2824.53,2049.49) FPGA.G3@2840.28,2033.74
  Signal Layer 1 w5: v2(2682,1286) 2694,1274 4104,1274 H2.32@4140,1310 ; v2(2682,2112) 2698.43,2112 2745.2,2065.24 2808.78,2065.24 v1(2824.53,2049.49)
FB.REN: FPGA.J7 H3.4 | length 2066.1
  Top Layer w5: v1(2950.51,1986.5) FPGA.J7@2966.26,1970.75
  Signal Layer 2 w5: v1(2950.51,1986.5) 2950.51,1983.49 2999,1935 2999,1638.63 3145.63,1492 4378,1492 H3.4@4545,1325
FB.WEN: FPGA.G1 H3.2 | length 2750.2
  Top Layer w5: v2(2776,1144) 2776,1346 2685.56,1436.44 2685.56,1989.85 2745.2,2049.49 v1(2761.54,2049.49) FPGA.G1@2777.28,2033.74
  Signal Layer 1 w5: v2(2776,1144) 4264,1144 H3.2@4445,1325
FPGAB.CLK+: FPGA.B2 H11.13 | length 1201.4
  Top Layer w5: v1@2793.03,2206.97 FPGA.B2@2808.78,2191.22
  Bottom Layer w5: v1(2794,2207) 2809,2222 2809,2248 2826.44,2265.44 2939.44,2265.44 2969,2295 2969,2373 2925,2373 2911,2387 2911,2443 3032,2564 3032,2712 H11.13@3340,3020
FPGAB.CLK-: FPGA.A2 H11.15 | length 1765.1
  Top Layer w5: FPGA.A2@2808.78,2222.72 v1(2793.03,2238.46) 2793.03,2254.8 2831.04,2292.81 2831.04,2745.96 2804,2773 2804,3135 2825,3156 3455,3156 3476,3135 3476,3056 H11.15@3440,3020
FPGAB.D0+: FPGA.B6 H11.9 | length 1109.2
  Top Layer w5: v1(2888,2251) 2859,2280 2859,2867 3004,3012 3004,3035 3025,3056 3104,3056 H11.9@3140,3020 ; v1(2919.02,2206.97) FPGA.B6@2934.76,2191.22
  Signal Layer 1 w5: v1(2888,2251) 2899.47,2251 2903.27,2254.8 2903.27,2222.72 v1(2919.02,2206.97)
FPGAB.D0-: FPGA.A6 H11.11 | length 936.8
  Top Layer w5: FPGA.A6@2934.76,2222.72 v1(2919.02,2238.46) 2919.02,2254.8 2919.02,2467.02 2950.17,2498.17 2950.17,2730.17 H11.11@3240,3020
FPGAB.D1+: FPGA.B4 H11.5 | length 1082.2
  Top Layer w5: v1@2856.02,2206.97 FPGA.B4@2871.77,2191.22
  Signal Layer 4 w5: v2(2655,2427) 2810,2272 2810,2197 2815,2192 2840,2192 v1(2856,2208)
  Bottom Layer w5: v2(2655,2427) 2746,2518 2746,2826 H11.5@2940,3020
FPGAB.D1-: FPGA.A4 H11.7 | length 929.2
  Top Layer w5: FPGA.A4@2871.77,2222.72 v1(2856.02,2238.46) 2856.02,2254.8 2874.59,2236.24 2895.24,2236.24 2904,2245 2904,2503 2936,2535 2936,2916 H11.7@3040,3020
FPGAB.D2+: FPGA.B3 H11.1 | length 1291
  Top Layer w5: v1@2824.53,2206.97 FPGA.B3@2840.28,2191.22
  Bottom Layer w5: H11.1@2740,3020 2740,2948 2556,2764 2556,2131 2752,2131 v1(2828,2207)
FPGAB.D2-: FPGA.A3 H11.3 | length 810.2
  Top Layer w5: H11.3@2840,3020 2840,2270.27 2824.53,2254.8 v1(2824.53,2238.46) FPGA.A3@2840.28,2222.72
GND: "ARM 20.4" "ARM 20.6" "ARM 20.8" "ARM 20.10" "ARM 20.12" "ARM 20.14" "ARM 20.16" "ARM 20.18" "ARM 20.20" "EFM HFOSC.2" "EFM LFOSC.2" "FPGA OSC.2" C1.1 C2.1 C3.1 C4.1 C5.1 C6.1 C7.1 C8.1 C9.1 C10.1 C11.1 C12.1 C13.1 C14.1 C15.1 C16.1 C17.1 C18.1 C19.1 C20.1 C21.1 C22.1 C23.1 C24.1 C25.1 C26.1 C27.1 C28.1 C29.1 C30.1 C31.1 C32.2 C33.2 C34.2 C35.2 C36.2 C37.2 C38.1 C39.2 C40.1 C41.1 C42.1 C43.1 C44.2 C45.2 C46.1 C47.1 C48.2 C49.1 C54.1 C55.1 C56.1 C57.1 C58.1 C59.1 C60.1 C61.1 C62.2 C63.2 C69.1 C70.1 C71.1 C72.1 D1.2 D5.2 DACX.6 DACY.6 EFM32.C7 EFM32.D4 EFM32.F9 EFM32.G3 EFM32.G9 EFM32.H6 EFM32.K4 EFM32.K7 EFM32.K10 EFM32.L7 FB.12 FB.34 FB.39 FB.40 FLASH1.10 FPGA.A1 FPGA.A18 FPGA.B7 FPGA.B13 FPGA.C3 FPGA.C16 FPGA.D4 FPGA.D5 FPGA.D10 FPGA.E15 FPGA.G2 FPGA.G5 FPGA.G12 FPGA.G17 FPGA.H8 FPGA.H10 FPGA.J4 FPGA.J9 FPGA.J11 FPGA.J15 FPGA.K8 FPGA.K10 FPGA.L9 FPGA.L11 FPGA.M2 FPGA.M6 FPGA.M17 FPGA.N13 FPGA.R1 FPGA.R4 FPGA.R9 FPGA.R14 FPGA.R18 FPGA.T16 FPGA.U6 FPGA.U12 FPGA.V1 FPGA.V18 H16.3 H17.1 H18.1 H23.3 HDMI.2 HDMI.5 HDMI.8 HDMI.11 HDMI.14 HDMI.17 JTAG.3 JTAG.5 JTAG.7 JTAG.9 JTAG.11 JTAG.13 PSU.5 RES_FPGA.2 RES_FPGA.4 RESET_BTN.1 RESET_BTN.3 SRAM1.12 SRAM1.34 SRAM1.39 SRAM1.40 VR12.2 VR33.1 VREF.4 ZOOM_IN.2 ZOOM_IN.4 ZOOM_OUT.2 ZOOM_OUT.4 | length 14151.4
  Top Layer w5: 704,2696 704,2669 735,2638 v2(759,2638) ; 1672.25,1954.25 FB.12@1738.62,1954.25 1756.75,1954.25 v2(1845,1866) ; FB.39@2191.38,2143.23 2219.77,2143.23 2254,2109 v2(2244,2109) ; v2(2234,2049) 2256.75,2026.25 2256.75,1985.75 ; HDMI.11@2374.41,3667.76 v2(2374.41,3717.1) ; v2(2395,176) 2477.94,176 2583.47,70.47 ; SRAM1.39@4251.38,2123.23 4288.78,2123.23 4361.23,2123.23 v2(4379,2141) ; 4317.25,1965.75 4317.25,2025 4328.25,2036 v2(4336,2036) ; EFM32.G9@4939.49,1873.5 v1(4955.24,1857.76) ; EFM32.F9@4939.49,1905 v1(4955.24,1889.25)
  Top Layer w8: v2(56,2702) 76.8,2722.8 DACX.6@134.72,2722.8 ; 704,2696 730.8,2722.8 DACY.6@799.72,2722.8 ; v1(2761.54,1671.54) FPGA.V1@2777.28,1687.28 ; v1(2761.54,1766.02) FPGA.R1@2777.28,1781.77 ; v1(2761.54,2238.46) FPGA.A1@2777.28,2222.72 ; v1(2793.03,1860.51) FPGA.M2@2808.78,1876.26 ; v1(2793.03,2049.49) FPGA.G2@2808.78,2033.74 ; v1(2824.53,2175.47) FPGA.C3@2840.28,2159.72 ; v1(2856.02,1766.02) FPGA.R4@2871.77,1781.77 ; v1(2856.02,1986.5) FPGA.J4@2871.77,1970.75 ; FPGA.D4@2871.77,2128.23 v1(2887.52,2143.98) FPGA.D5@2903.27,2128.23 ; v1(2887.52,2049.49) FPGA.G5@2903.27,2033.74 ; v1(2919.02,1703.03) FPGA.U6@2934.76,1718.78 ; FPGA.M6@2934.76,1876.26 v1(2950,1861.02) ; v1(2950.51,2206.97) FPGA.B7@2966.26,2191.22 ; v1(2982.01,1923.5) FPGA.K8@2997.76,1939.25 ; v1(2982.01,2017.99) FPGA.H8@2997.76,2002.24 ; v1(3013.5,1766.02) FPGA.R9@3029.25,1781.77 ; v1(3013.5,1892.01) FPGA.L9@3029.25,1907.76 ; v1(3013.5,1986.5) FPGA.J9@3029.25,1970.75 ; FPGA.K10@3060.75,1939.25 v1(3076.5,1923.5) FPGA.L11@3092.24,1907.76 ; FPGA.H10@3060.75,2002.24 v1(3076.5,2017.99) ; FPGA.D10@3060.75,2128.23 v1(3076.5,2143.98) ; FPGA.J11@3092.24,1970.75 v1(3107.99,1986.5) 3107.99,2016.99 3123.74,2032.74 FPGA.G12@3123.74,2033.74 ; FPGA.U12@3123.74,1718.78 v1(3139.49,1703.03) ; FPGA.N13@3155.24,1844.76 v1(3170.98,1829.02) ; FPGA.B13@3155.24,2191.22 v1(3170.98,2206.97) ; FPGA.R14@3186.73,1781.77 v1(3202.48,1766.02) ; FPGA.J15@3218.23,1970.75 v1(3233.98,1986.5) ; FPGA.E15@3218.23,2096.73 v1(3233.98,2112.48) ; FPGA.T16@3249.72,1750.28 v1(3265.47,1734.53) ; FPGA.C16@3249.72,2159.72 v1(3265.47,2175.47) ; FPGA.M17@3281.22,1876.26 v1(3296.97,1860.51) ; FPGA.G17@3281.22,2033.74 v1(3296.97,2049.49) ; FPGA.V18@3312.72,1687.28 v1(3328.46,1671.54) ; FPGA.R18@3312.72,1781.77 3355.23,1781.77 v2(3359,1778) ; FPGA.A18@3312.72,2222.72 3325,2235 v1(3325,2243) ; SRAM1.12@3798.62,1934.25 3877,1934.25 v2(3877,1920) ; v1(4734.76,1857.76) EFM32.G3@4750.51,1873.5 ; v1(4766.26,1763.27) EFM32.K4@4782.01,1779.02 ; v1(4766.26,1983.74) EFM32.D4@4782.01,1967.99 ; v1(4829.25,1826.26) EFM32.H6@4845,1842.01 ; EFM32.L7@4876.5,1747.52 v1(4892.24,1731.77) ; EFM32.K7@4876.5,1779.02 v1(4892.24,1763.27) ; EFM32.C7@4876.5,1999.49 v1(4892.24,2015.24) ; EFM32.K10@4970.98,1779.02 v1(4986.73,1763.27)
  Top Layer w12: HDMI.2@2197.24,3667.76 2197.24,3535.76 v3(2228,3505) ; HDMI.5@2256.3,3667.76 2256.3,3550.3 2228,3522 v3(2228,3505) ; HDMI.8@2315.35,3667.76 2315.35,3514.35 2306,3505 v3(2228,3505) ; HDMI.11@2374.41,3667.76 2374.41,3496.41 2344,3466 2267,3466 v3(2228,3505) ; HDMI.14@2433.46,3667.76 2433.46,3599.54 2496,3537 2547,3537 2581,3571 v3(2581,3609) 2508,3609 2492.52,3624.48 HDMI.17@2492.52,3667.76
  Top Layer w20: RES_FPGA.2@50,585 RES_FPGA.4@227.17,585 v3(360,585) ; v3(237.51,2244.49) VREF.4@315,2244.49 ; v3(1036,50) ZOOM_IN.2@1150,50 1150,133 ZOOM_IN.4@1150,227.17 ; 1672.25,1954.25 FB.12@1738.62,1954.25 ; ZOOM_OUT.4@1865,232.17 1865,144 ZOOM_OUT.2@1865,55 v3(1955,55) ; FB.34@2191.38,1985.75 2256.75,1985.75 ; FB.39@2191.38,2143.23 2229.23,2143.23 2260.72,2174.72 FB.40@2191.38,2174.72 ; D5.2@2484.05,70.47 2583.47,70.47 ; v3(3933,3562) 3958,3587 3958,3758.18 PSU.5@3960.82,3761 ; 3997.42,2965.16 3997.42,2936.58 v3(4049,2885) ; SRAM1.34@4251.38,1965.75 4317.25,1965.75 ; SRAM1.39@4251.38,2123.23 4288.78,2123.23 4320.28,2154.72 SRAM1.40@4251.38,2154.72 ; v3(4696,2950.16) 4757.42,2950.16 ; FLASH1.10@4779.06,665 v3(4877,665) ; 5255.1,2980.16 v3(5306,2980.16) ; v3(5638.27,2118.27) RESET_BTN.1@5720,2118.27 5805.27,2118.27 RESET_BTN.3@5897.17,2118.27
  Top Layer w25: v5(4465,3354) VR12.2@4465,3436.85
  Top Layer w35: v4(3480,3298) VR33.1@3480,3401.42
  Bottom Layer w5: C44.2@387,2700.57 428.43,2700.57 ; C14.1@2579.57,1700 C13.1@2579.57,1790 C10.1@2579.57,2063.57 ; C15.1@2745,1499.57 2831.06,1499.57 C17.1@2930,1499.57 2989.57,1499.57 ; C5.1@2940,2415.43 3143.06,2415.43 3147,2411.5 C2.1@3240,2411.5 ; C40.1@3390,3359.57 C40.1@3392,3357.57 ; C58.1@3669.7,2922 C58.1@3672.42,2924.73 ; C30.1@4560.43,1705 C30.1@4565.43,1700 ; C31.1@4670,1635.43 4917.57,1635.43 ; C72.1@4720,3525.57 C72.1@4720.43,3526 ; C56.1@4892.42,2949.73 4923.73,2949.73
  Bottom Layer w20: C49.1@155,1984.57 v3(228.43,1984.57) ; C44.2@387,2700.57 428.43,2700.57 494,2700.57 ; C48.2@484.53,1825 v3(557,1825) ; v3(494,2644) 494,2700.57 ; C45.2@597,2700.57 555.57,2700.57 494,2700.57 ; C47.1@670,2039.57 v3(747.57,2039.57) ; C46.1@675,2324.57 v3(752.57,2324.57) ; C60.1@1049,2701.57 C61.1@1160,2701.57 ; v3(1160,2633) C61.1@1160,2701.57 ; C63.2@1364,2703.57 1363,2704.57 C62.2@1273,2704.57 1270,2701.57 C61.1@1160,2701.57 ; v3(2508,2045) 2559.57,2045 C10.1@2584.57,2070 C11.1@2584.57,1980 2584.57,1888.94 C12.1@2588.5,1885 2588.5,1798.94 C13.1@2579.57,1790 C14.1@2579.57,1700 ; v3(2730,2160) C9.1@2655.43,2160 C8.1@2655.43,2255 ; C15.1@2745,1499.57 2831.06,1499.57 C16.1@2840,1508.5 2921.06,1508.5 C17.1@2930,1499.57 C18.1@3030,1499.57 ; C7.1@2755,2405.43 2705.43,2405.43 2655.43,2355.43 C8.1@2655.43,2255 ; C6.1@2845,2338.5 2845,2287 2687.43,2287 C8.1@2655.43,2255 ; C5.1@2940,2415.43 2945,2420.43 C4.1@3040,2420.43 C3.1@3145,2420.43 3149.94,2415.5 3244,2415.5 3320.06,2415.5 C1.1@3335,2430.43 ; v3(3072,1438) 3030,1480 C18.1@3030,1499.57 ; C2.1@3240,2411.5 3240,2444 v3(3297,2501) ; v3(3280.43,3226.43) C69.1@3280.43,3275 ; C21.1@3320,1499.57 3306.06,1513.5 C20.1@3225,1513.5 3211.06,1499.57 C19.1@3135,1499.57 C18.1@3030,1499.57 ; C22.1@3500.43,1660 C23.1@3500.43,1755 ; C25.1@3500.43,1940 3491.5,1931.06 C24.1@3491.5,1850 3491.5,1763.94 C23.1@3500.43,1755 ; v3(3548,1785) 3518,1755 C23.1@3500.43,1755 ; v3(3549,2922) C58.1@3669.7,2922 ; C70.1@3764.43,3248 3834,3248 v3(3857,3271) ; C59.1@4122.42,3015.59 v3(4206.59,3015.59) ; C71.1@4349.43,3498 4354,3493.43 v3(4354,3449) ; v3(4383,2898) 4427.42,2942.42 C57.1@4427.42,2944.73 ; v3(4402,1675) 4449,1628 4514,1628 4565.43,1679.43 C30.1@4565.43,1700 4560.43,1705 C29.1@4560.43,1795 C28.1@4560.43,1890 C27.1@4560.43,1985 C26.1@4560.43,2080 ; v3(4580,1481) 4580,1557 4658.43,1635.43 C31.1@4670,1635.43 4675,1640.43 C32.2@4770,1640.43 C33.2@4870,1640.43 C34.2@4960,1640.43 5050,1640.43 C35.2@5055,1635.43 5124.57,1705 C36.2@5124.57,1730 5124.57,1830 C37.2@5129.57,1835 ; C43.1@4614,3343.57 4615.57,3342 v3(4695,3342) ; v3(4720,3469) C72.1@4720,3525.57 ; v3(4890,2894) C56.1@4890,2947.3 ; C56.1@4892.42,2949.73 4923.73,2949.73 4984.59,3010.59 C54.1@5022.42,3010.59 ; C39.2@5139.57,2045 5139.57,2022.43 5205.43,1956.57 C38.1@5205.43,1930 5252,1930 v3(5284,1962) ; C55.1@5417.42,3005.59 v3(5495.41,3005.59)
  Bottom Layer w35: v4(3392,3242) C40.1@3392,3357.57 ; C41.1@3767.57,3357 v4(3895,3357) ; v4(4241,3879) 4330,3790 H18.1@4385,3790 ; v4(4320,3269) C42.1@4320,3334.57
GPIO.0: EFM32.H4 H31.2 | length 2281.2
  Top Layer w5: v1(4766.26,1826.26) EFM32.H4@4782.01,1842.01
  Signal Layer 2 w5: v1(4766.26,1826.26) 4781,1841 4838,1841 4875,1804 4875,1789 4885,1779 5015,1779 5039,1803 5039,1818 5025,1832 5015,1832 5002,1845 5002,1867 4995,1874 4912,1874 4875.19,1910.81 4875.19,1998.44 4862,2011.62 4862,3328 H31.2@5062,3528
GPIO.1: EFM32.H5 H31.4 | length 2174
  Top Layer w5: v1(4797.76,1826.26) EFM32.H5@4813.5,1842.01
  Signal Layer 2 w5: v1(4797.76,1826.26) 4813.5,1810.51 4813.5,1713.66 4845.66,1713.66 v1(4861,1729)
  Bottom Layer w5: v1(4861,1729) 4875.19,1743.19 4875.19,2068.84 4872.69,2071.34 4872.69,2137.69 5141,2406 5141,2576.19 5149.9,2585.1 5149.9,3080.9 5226,3157 5226,3464 H31.4@5162,3528
GPIO.2: EFM32.J5 H31.6 | length 2950.4
  Top Layer w5: v1(4797.76,1794.76) EFM32.J5@4813.5,1810.51 ; v2(5231,1382) 5341,1492 5341,3209 5226,3324 5226,3492 H31.6@5262,3528
  Signal Layer 2 w5: v1(4797.76,1794.76) 4782.01,1779.02 4782.01,1713.66 4792.67,1703 4910,1703 v2(5231,1382)
GPIO.3: EFM32.J6 H31.8 | length 2263.7
  Top Layer w5: v1(4829.25,1794.76) EFM32.J6@4845,1810.51
  Signal Layer 1 w5: v1(4829.25,1794.76) 4845,1779.02 4845,1713.66 4862.88,1695.79 4964.79,1695.79 v2(4971,1702)
  Bottom Layer w5: v2(4971,1702) 4971,2182 5150,2361 5150,2513 5242,2605 5242,3218 5398,3374 5398,3492 H31.8@5362,3528
GPIO.4: EFM32.K5 H31.10 | length 2412.9
  Top Layer w5: v1(4797.76,1763.27) EFM32.K5@4813.5,1779.02
  Bottom Layer w5: v1@4799,1763 4814,1748 4814,1725 4825,1714 4920,1714 4965,1669 5034,1669 5077,1712 5077,1781 5101,1805 5101,1865 5111,1875 5134.88,1875 5174.88,1915 5174.88,1948.12 5111,2012 5111,2243 5193,2325 5193,2536 5267,2610 5267,3191 5426,3350 5426,3492 H31.10@5462,3528
HDMI.5V: H14.2 HDMI.18 | length 878.9
  Top Layer w12: v4(2508,3860) 2512.2,3855.8 HDMI.18@2512.2,3667.76
  Signal Layer 1 w35: H14.2@1850,3795 2369,3795 2443,3795 v4(2508,3860)
HDMI.CEC: H12.1 HDMI.13 | length 871.5
  Top Layer w5: v2(2413.78,3360) HDMI.13@2413.78,3667.76
  Signal Layer 3 w5: H12.1@1850,3360 v2(2413.78,3360)
HDMI.CLK+: H11.14 HDMI.10 | length 1298.7
  Top Layer w5: v2(2354.72,3618) HDMI.10@2354.72,3667.76
  Signal Layer 4 w5: v2(2354.72,3618) 2392.72,3580 2666,3580 3104,3142 3104,3095 3115,3084 3304,3084 H11.14@3340,3120
HDMI.CLK-: H11.16 HDMI.12 | length 1301.9
  Top Layer w5: v2(2394.09,3618) HDMI.12@2394.09,3667.76
  Signal Layer 1 w5: v2(2394.09,3618) 2856.09,3156 3404,3156 H11.16@3440,3120
HDMI.D0+: H11.10 HDMI.7 | length 1136
  Top Layer w5: HDMI.7@2295.67,3667.76 2295.67,3708.67 v2(2304,3717)
  Signal Layer 4 w5: v2(2304,3717) 2319,3702 2558,3702 H11.10@3140,3120
HDMI.D0-: H11.12 HDMI.9 | length 1289.5
  Top Layer w5: HDMI.9@2335.04,3667.76 v2(2335.04,3717)
  Signal Layer 4 w5: v2(2335.04,3717) 2391.04,3773 2658,3773 3240,3191 H11.12@3240,3120
HDMI.D1+: H11.6 HDMI.4 | length 1001.4
  Top Layer w5: v2(2236.61,3583) HDMI.4@2236.61,3667.76
  Signal Layer 4 w5: v2(2236.61,3583) 2236.61,3546.39 2270,3513 2547,3513 H11.6@2940,3120
HDMI.D1-: H11.8 HDMI.6 | length 1061.6
  Top Layer w5: v2(2275.98,3547) HDMI.6@2275.98,3667.76
  Signal Layer 4 w5: v2(2275.98,3547) 2613,3547 H11.8@3040,3120
HDMI.D2+: H11.2 HDMI.1 | length 906.9
  Top Layer w5: HDMI.1@2177.56,3667.76 2177.56,3467 2317.56,3327 2533,3327 H11.2@2740,3120
HDMI.D2-: H11.4 HDMI.3 | length 1146.6
  Top Layer w5: HDMI.3@2216.93,3667.76 v2(2216.93,3732)
  Signal Layer 2 w5: v2(2216.93,3732) 2236.93,3752 2531,3752 2840,3443 H11.4@2840,3120
HDMI.DDC_CLK: H13.2 HDMI.15 | length 685.9
  Top Layer w5: HDMI.15@2453.15,3667.76 v2(2453.15,3718)
  Signal Layer 3 w5: v2(2453.15,3718) 2453.15,3751.15 2475,3773 3007,3773 H13.2@3035,3745
HDMI.DDC_DATA: H13.4 HDMI.16 | length 804
  Top Layer w5: v2(2471,3613) 2472.83,3614.83 HDMI.16@2472.83,3667.76
  Signal Layer 1 w5: v2(2471,3613) 2480,3613 2648,3781 3099,3781 H13.4@3135,3745
"NetARM 20_7": "ARM 20.7" EFM32.E8 | length 1816.2
  Top Layer w5: EFM32.E8@4907.99,1936.5 v1(4923.74,1952.24)
  Signal Layer 2 w5: v1(4923.74,1952.24) 4939.49,1967.99 5036.34,1967.99 5695,1309.33 5695,760 5715,740 5810,740 5860,690
"NetARM 20_9": "ARM 20.9" EFM32.D8 | length 1736
  Top Layer w5: EFM32.D8@4907.99,1967.99 v1(4923.74,1983.74)
  Signal Layer 2 w5: v1(4923.74,1983.74) 4939.49,1999.49 5036.34,1999.49 5710,1325.83 5710,865 5735,840 5810,840 5860,790
"NetARM 20_13": "ARM 20.13" EFM32.C8 | length 1550.7
  Top Layer w5: EFM32.C8@4907.99,1999.49 v1(4924,2015.5)
  Signal Layer 2 w5: v1(4924,2015.5) 4938.5,2030 5029,2030 5055,2004 5111,2004 5824,1291 5824,1026 5860,990
"NetARM 20_15": "ARM 20.15" EFM32.K6 RESET_BTN.2 RESET_BTN.4 | length 2864.2
  Top Layer w5: v1(4829.25,1763.27) EFM32.K6@4845,1779.02 ; RESET_BTN.2@5720,1760 RESET_BTN.4@5897.17,1760 5897.17,1127.17 5860,1090
  Signal Layer 1 w5: v1(4829.25,1763.27) 4813.5,1779.02 4813.5,1899.5 4835,1921 v1(4924,1921)
  Signal Layer 4 w5: v1(4924,1921) 5775,1921 5796,1900 5796,1154 5860,1090